# Altium PCB PCB1Extention.PcbDoc
Units mm, origin at the board's own origin, x right, y up, seen from the top; angles counter-clockwise.
Board outline 62.97 x 56.64 mm, 2 copper layers (Top Layer, Bottom Layer); 23 components, 23 nets, 82 pads, 0 vias.
Unrouted connection lines stored in the file: 1.
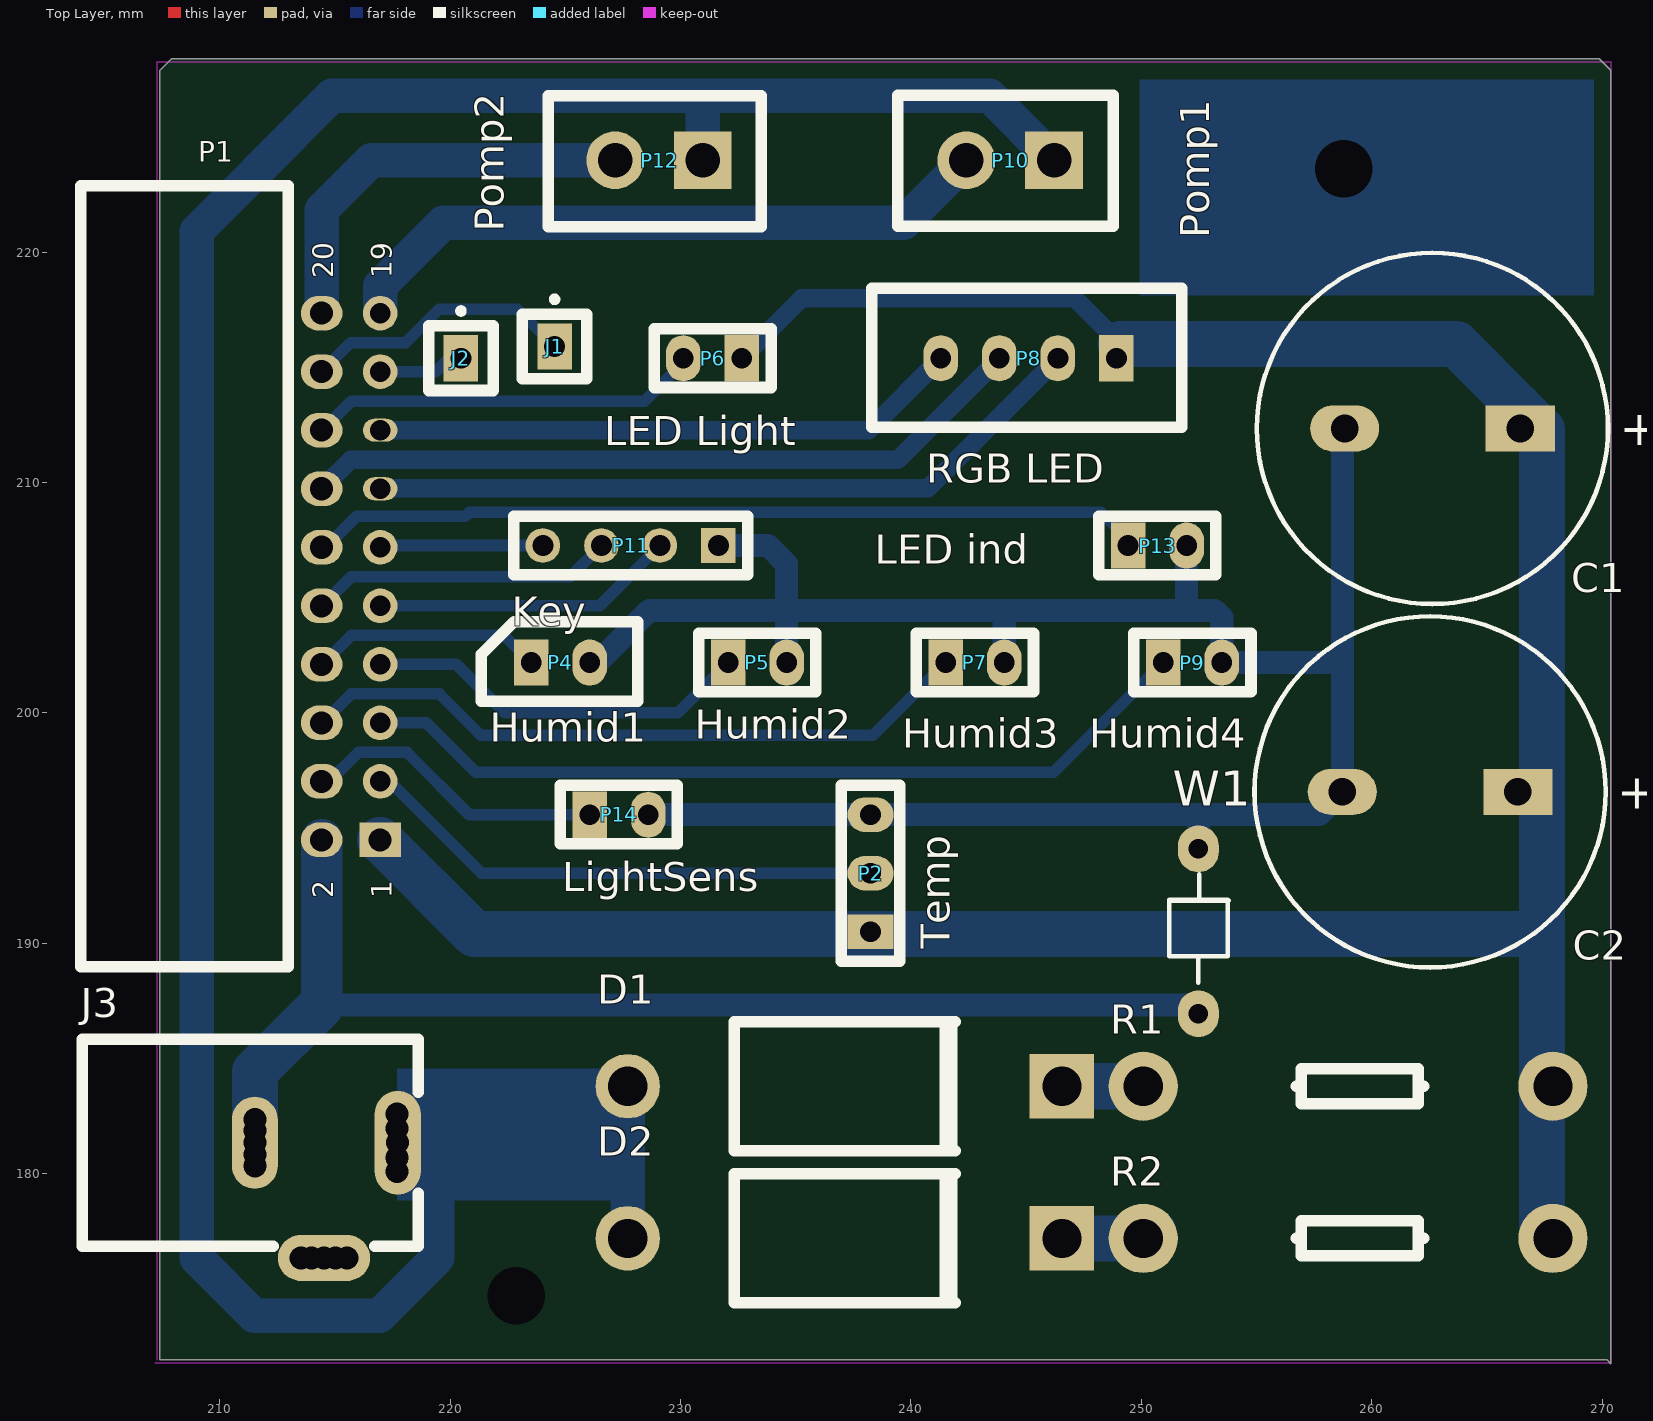
[diagram p0: Top Layer view]
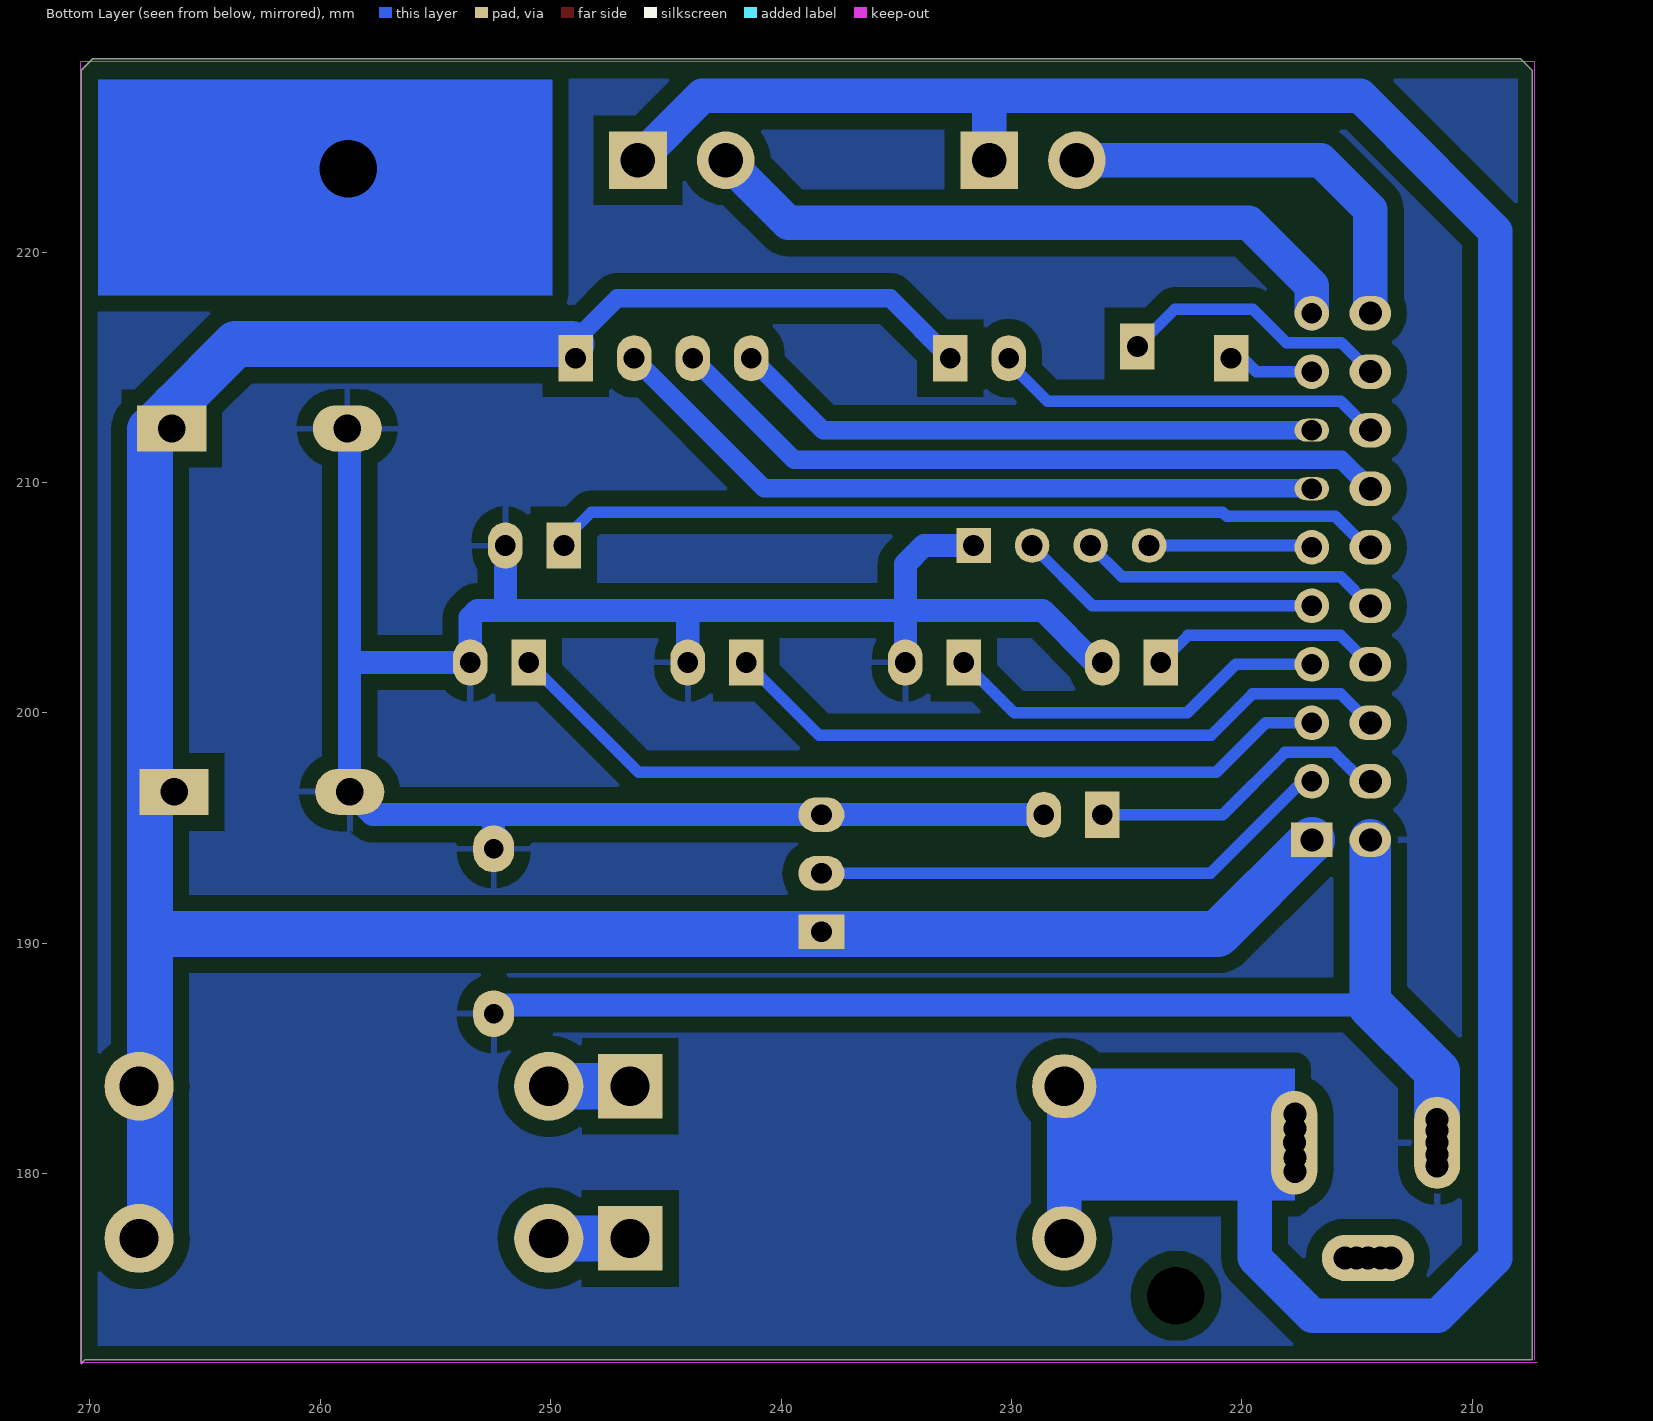
[diagram p1: Bottom Layer view, seen from below]

## Layer stack, top to bottom
Top Layer: signal copper 0.0356
Dielectric: dielectric 0.32, FR-4, Dk 4.8
Bottom Layer: signal copper 0.0356

## Board outline
207.404,171.92 270.207,171.92 270.374,171.753 270.374,227.895 269.875,228.394 207.904,228.394 207.404,227.894

## Design rules (kind name [scope] priority, off if disabled: settings)
Clearance [All] p1: gap=0.7
PolygonConnect [All] p1: connectstyle=Relief reliefconductorwidth=0.254 reliefentries=4 polygonreliefangle="90 Angle"
RoutingVias [All] p1: holewidth=0.711 width=2.54 viastyle="Through Hole" minholewidth=0.4 minwidth=1.27 maxholewidth=5 maxwidth=10
SilkscreenOverComponentPads [All] p1: minsilkscreentomaskgap=0.254
SolderMaskExpansion [All] p1: expansion=0.102
TestPointUsage [All] p1: valid=0 allowmultiple=FALSE
Testpoint [All] p1: side=15 testpointundercomponent=TRUE minsize=1.016 maxsize=2.54 preferedsize=1.524 minholesize=0 maxholesize=1.016 preferedholesize=0.813 testpointgrid=0.025 style=1023 order=0123456789
Width [All] p1: maxlimit=2.54 minlimit=0.254 preferedwidth=0.254
23 further rules are at their usual default settings.

## Components (designator, comment, footprint, x,y, rotation, side; value= is the part's Value field where it differs from the comment)
C1 "Cap Pol1" RB7.6-15 262.636,212.344 r0 top
C2 "Cap Pol1" RB7.6-15 262.534,196.571 r0 top
D1 "Diode 1N5408" DO-201AD 237.132,183.795 r0 top
D2 "Diode 1N5408" DO-201AD 237.132,177.191 r0 top
J1 "Socket" PIN1 224.536,215.9 r0 top
J2 "Socket" PIN1 220.472,215.392 r0 top
J3 "Phonejack2 TN" JACK12V 211.836,181.356 r90 top
P1 "Header 10X2" HDR2X10 216.967,194.488 r90 top
P2 "Temp" HDR1X3 238.252,190.5 r90 top
P4 "Humid1" HDR1X2#1 223.52,202.184 r0 top
P5 "Humid2" HDR1X2#1 232.071,202.184 r0 top
P6 "LED Light" HDR1X2#1 232.664,215.392 r180 top
P7 "Humid3" HDR1X2#1 241.512,202.184 r0 top
P8 "RGB LED" HDR1X4#1 248.92,215.392 r180 top
P9 "Humid4" HDR1X2#1 250.952,202.184 r0 top
P10 "Pomp1" HDR1X2#2 246.213,223.985 r180 top
P11 "Key" HDR1X4#2 231.648,207.264 r180 top
P12 "Pomp2" HDR1X2#2 230.973,223.985 r180 top
P13 "LED ind" HDR1X2#1 249.428,207.264 r0 top
P14 "LightSens" HDR1X2#1 226.06,195.58 r0 top
R1 "Res1" AXIAL-0.3 259.484,183.795 r180 top
R2 "Res1" AXIAL-0.3 259.484,177.191 r180 top
W1 "Jumper" R_DIP 252.476,186.944 r90 top

## Footprints (in the part's own frame and the unit in brackets; to place one, negate y for a bottom-side part, rotate by r counter-clockwise, add the part's x,y. Pads: shape width x height; smd on the part's side, far side on the other; paste and mask are expansions set on the pad)
AXIAL-0.3 [mm] "Resistor; 2 Leads"
  round 3 hole 1.7: 1(-8.382,0) 2(9.398,0)
  silkscreen extent -2.77,-0.76 2.77,0.76
DO-201AD [mm] "Diode, Axial; Body 9.5 x 5.6 mm (LxDia. max), Lead Dia. 1.32 mm (max)"
  round 2.8 hole 1.7: 1(-9.42,0)
  rect 2.8x2.8 hole 1.7: 2(9.42,0)
  silkscreen extent -4.8,-2.8 4.9,2.8
HDR1X2#1 [mm] "Connector; Header; 2 Position"
  rect 1.5x2 hole 0.9: 1(0,0)
  oval 1.5x2 hole 0.9: 2(2.54,0)
  silkscreen extent -2.16,-1.68 4.62,1.78
HDR1X2#2 [mm] "Connector; Header; 2 Position"
  rect 2.5x2.5 hole 1.5: 1(0,0)
  round 2.5 hole 1.5: 2(3.81,0)
  silkscreen extent -2.57,-2.82 6.78,2.87
HDR1X3 [mm] "Connector; Header; 3 Position"
  rect 1.5x2 hole 0.9: 1(0,0)
  oval 1.5x2 hole 0.9: 2(2.54,0) 3(5.08,0)
  silkscreen extent -1.27,-1.27 6.35,1.27
HDR1X4#1 [mm] "Connector; Header; 4 Position"
  rect 1.5x2 hole 0.9: 1(0,0)
  oval 1.5x2 hole 0.9: 2(2.54,0) 3(5.08,0) 4(7.62,0)
  silkscreen extent -2.85,-3.04 10.61,2.99
HDR1X4#2 [mm] "Connector; Header; 4 Position"
  rect 1.5x1.5 hole 0.9: 1(0,0)
  round 1.5 hole 0.9: 2(2.54,0) 3(5.08,0) 4(7.62,0)
  silkscreen extent -1.27,-1.27 8.89,1.27
HDR2X10 [mm] "Connector; Header; 10x2 Position"
  rect 1.5x1.8 hole 1: 1(0,0)
  oval 1.5x1.8 hole 1: 2(0,2.54) 4(2.54,2.54) 6(5.08,2.54) 8(7.62,2.54) 10(10.16,2.54) 12(12.7,2.54) 14(15.24,2.54) 16(17.78,2.54) 18(20.32,2.54) 20(22.86,2.54)
  round 1.5 hole 0.9: 3(2.54,0) 5(5.08,0) 7(7.62,0) 9(10.16,0) 11(12.7,0) 17(20.32,0) 19(22.86,0)
  oval 1x1.5 hole 0.9: 13(15.24,0) 15(17.78,0)
  silkscreen extent -5.5,4 28.4,13
JACK12V [mm]
  oval 4.5x2 hole 1: 1(-0.013,-5.892)
  round 0 hole 1: 1A(-1.263,-5.866) 1A(-0.664,-5.866) 1A(0.606,-5.866) 1B(1.237,-5.866) 2A(-1.013,0.308) 2A(-0.524,0.308) 2B(0.527,0.308) 2B(0.987,0.308) 3A(-5.013,-3.196) 3A(-5.013,-2.146) 3A(-5.013,-1.692) 3B(-5.013,-3.692)
  oval 4x2 hole 1: 2(-0.013,0.308)
  oval 2x4 hole 1: 3(-5.013,-2.692)
  silkscreen extent -4.51,-6.79 4.49,7.81, body extent -5.07,-6.67 1.13,0.75, height 6
PIN1 [mm] "Connector; Plug"
  rect 1.5x2 hole 0.9: 1(0,0)
  silkscreen extent -1.4,-1.4 1.4,2.17
R_DIP [mil]
  oval 80x70 hole 33.46: 1(0,0) 2(281.5,0)
  silkscreen extent 53,-52 238,50, body extent -5,-52 296,50, height 278
RB7.6-15 [mm] "Polarized Capacitor (Radial); 2 Leads"
  rect 3x2 hole 1.2: 1(3.81,0)
  oval 3x2 hole 1.2: 2(-3.81,0)
  silkscreen extent -7.62,-7.62 7.62,7.62

## Part data
C1 C2: "Polarized Capacitor (Radial)"
D1 D2: "3 Amp Medium Power Silicon Rectifier Diode"
J3: "Jack Socket, 1/4\" [6.5mm], Thru-Hole, Vertical, 2-Conductor with Tip closed"
P1: "Header, 10-Pin, Dual row"
P2: library part "Header 3", "Header, 3-Pin"
P4 P5 P6 P7 P9 P10 P12 P13 P14: library part "Header 2", "Header, 2-Pin"
P8 P11: library part "Header 4", "Header, 4-Pin"
R1 R2: "Resistor"
W1: "Jumper Wire"

## Free pads (board coordinates)
  round 0 hole 2.5: 0(222.864,174.701) 0(258.794,223.624)

## Nets (pads, with @x,y where several pads share a name; then routed paths per layer and width w, separated by ;. In a path a pad name is that pad's centre, name@x,y a point inside that pad or via, vN(x,y) a via of type N, cw(c..) or ccw(c..) an arc to the next point about the centre after c; other vN are vias at no path point)
+12: C1.1 C2.1 P1.1 P2.1 P6.1 P8.1 R1.1 R2.1 | length 125.5
  Bottom Layer w0.8: P6.1 235.259,217.987 247.121,217.987 248.92,216.188 P8.1
  Bottom Layer w2: P1.1 221.056,190.398 267.386,190.398 ; P8.1@249.105,216.002 263.677,216.002 266.344,213.335 267.386,212.293 267.386,190.398 ; R2.1@267.386,177.571 267.386,190.398
+12IN: D1.1 D2.1 J3.1 P10.1 P12.1 | length 114
  Bottom Layer w1.5: 211.39,223.299 209.001,220.911 209.001,176.34 211.503,173.838 216.938,173.838 219.452,176.352 219.452,183.318 ; 211.557,223.466 214.869,226.779 243.419,226.779 P10.1 ; D2.1 D1.1 ; P12.1 230.973,226.703
GND: C1.2 C2.2 J3.2 P1.2 P2.3 P4.2 P5.2 P7.2 P9.2 P11.1 P13.2 P14.2 W1.1 W1.2 | length 149.1
  Bottom Layer w1: 214.427,187.325 252.095,187.325 W1.1 ; P4.2 226.39,202.184 228.651,204.445 234.611,204.445 ; P14.2 P2.3 252.476,195.58 ; P11.1 233.807,207.264 234.611,206.46 234.611,204.445 ; P5.2 234.611,204.445 ; P7.2 244.052,204.385 ; 251.968,204.572 P13.2 ; W1.2 252.476,195.58 ; 258.724,201.066 258.724,201.676 ; C1.2@258.724,212.344 258.724,202.184 ; 234.611,204.445 253.187,204.445 253.492,204.14 P9.2 258.724,202.184 ; 252.476,195.58 257.734,195.58 C2.2 258.724,201.676 ; 258.724,201.676 258.724,202.184
  Bottom Layer w1.8: 214.427,187.325 P1.2
  Bottom Layer w2: J3.2 211.528,184.426 214.427,187.325
HUMIDSENS01: P1.8 P4.1 | length 10.1
  Bottom Layer w0.5: P1.8 214.459,202.108 215.713,203.362 222.342,203.362 P4.1
HUMIDSENS02: P1.7 P5.1 | length 16.9
  Bottom Layer w0.5: P1.7 220.266,202.108 222.373,200.001 229.888,200.001 P5.1
HUMIDSENS03: P1.6 P7.1 | length 29.7
  Bottom Layer w0.5: P1.6 214.459,199.568 215.713,200.822 219.541,200.822 221.341,199.022 238.35,199.022 P7.1
HUMIDSENS04: P1.5 P9.1 | length 36.8
  Bottom Layer w0.5: P1.5 218.963,199.568 221.11,197.421 246.189,197.421 P9.1
KEYBUTTON01: P1.9 P11.2 | length 13.2
  Bottom Layer w0.5: P1.9 226.492,204.648 P11.2
KEYBUTTON02: P1.10 P11.3 | length 13.2
  Bottom Layer w0.5: P1.10 214.459,204.648 215.713,205.902 225.206,205.902 P11.3
KEYBUTTON03: P1.11 P11.4 | length 7.1
  Bottom Layer w0.5: P1.11 217.043,207.264 P11.4
LEDINDICATOR01: P1.12 P13.1 | length 36.2
  Bottom Layer w0.5: P1.12 P1.12@214.459,207.188 ; P1.12@214.602,207.188 215.95,208.536 220.66,208.536 ; 220.702,208.578 220.824,208.7 248.25,208.7 249.428,207.522 P13.1
LEDLIGHT01: P1.13 P8.2 | length 31.8
  Bottom Layer w0.8: P1.13 216.989,209.75 240.738,209.75 P8.2
LEDLIGHT02: P1.14 P8.3 | length 31.8
  Bottom Layer w0.8: P1.14 215.681,210.982 239.43,210.982 P8.3
LEDLIGHT03: P1.15 P8.4 | length 25.6
  Bottom Layer w0.8: P1.15 238.176,212.268 P8.4
LEDLIGHT04: P1.16 P6.2 | length 17.1
  Bottom Layer w0.5: P1.16 214.452,212.268 215.706,213.522 228.438,213.522 230.124,215.208 P6.2
LIGHTSENS01: P1.4 P14.1 | length 13.3
  Bottom Layer w0.5: P1.4 214.757,197.028 216.011,198.282 218.133,198.282 220.835,195.58 P14.1
NetD1_2: D1.2 R1.2 | length 3.6
  Bottom Layer w1: R1.2@250.467,183.897 R1.2@250.543,183.82
  Bottom Layer w2: D1.2 R1.2
NetD2_2: D2.2 R2.2 | length 4.1
  Bottom Layer w2: D2.2 R2.2 ; R2.2@250.086,177.121 250.168,177.121 R2.2@250.518,177.47
POMP01: P1.19 P10.2 | length 29
  Bottom Layer w0.5: P1.19 P1.19@217.019,217.4
  Bottom Layer w1.5: P1.19 216.967,218.531 219.704,221.268 239.686,221.268 P10.2
POMP02: P1.20 P12.2 | length 19.4
  Bottom Layer w0.5: P1.20 214.427,218.669
  Bottom Layer w1.5: P1.20 214.427,221.841 216.571,223.985 P12.2
RELAY01: J1.1 P1.18 | length 11.9
  Bottom Layer w0.5: P1.18 215.681,216.062 218.07,216.062 219.536,217.528 222.908,217.528 J1.1
RES3: J2.1 P1.17 | length 3.2
  Bottom Layer w0.5: P1.17 219.38,214.808 J2.1@219.964,215.392
TEMPSENS01: P1.3 P2.2 | length 22.9
  Bottom Layer w0.5: P1.3 217.374,197.028 221.362,193.04 P2.2
pads on no net: J3.1A J3.1B J3.2A J3.2B J3.3 J3.3A J3.3B
copper on no net: | length 0.2
  Bottom Layer w1: 214.427,194.488 214.576,194.339

## Polygon pours and split planes (outlines as drawn)
GND on Bottom Layer "Bottom Layer-No Net" (solid, pour order 1000): 207.297,228.255 270.401,228.255 270.401,171.792 207.297,171.792

## Keep-outs
Keep-Out Layer:
  lines w0.05: 207.181,171.792 270.401,171.792 270.401,228.255 207.297,228.255 207.297,171.908

## Other copper
Bottom Layer:
  rectangle net +12IN: 217.702,178.841 227.987,184.572
  rectangle: 249.933,218.122 269.638,227.493

## Text inside footprints (layer, text, board x,y; h text height)
C1: Top Overlay "+" at 270.768,211.607 h1.5
C2: Top Overlay "+" at 270.666,195.834 h1.5
P1: Top Overlay "2" at 214.935,191.948 h0.89 r90; Top Overlay "1" at 217.475,191.948 h0.89 r90; Top Overlay "19" at 217.475,218.872 h0.89 r90; Top Overlay "20" at 214.935,218.872 h0.89 r90